# EAGLE board SmartMatrixSD_V3 (EAGLE 7.2.0)
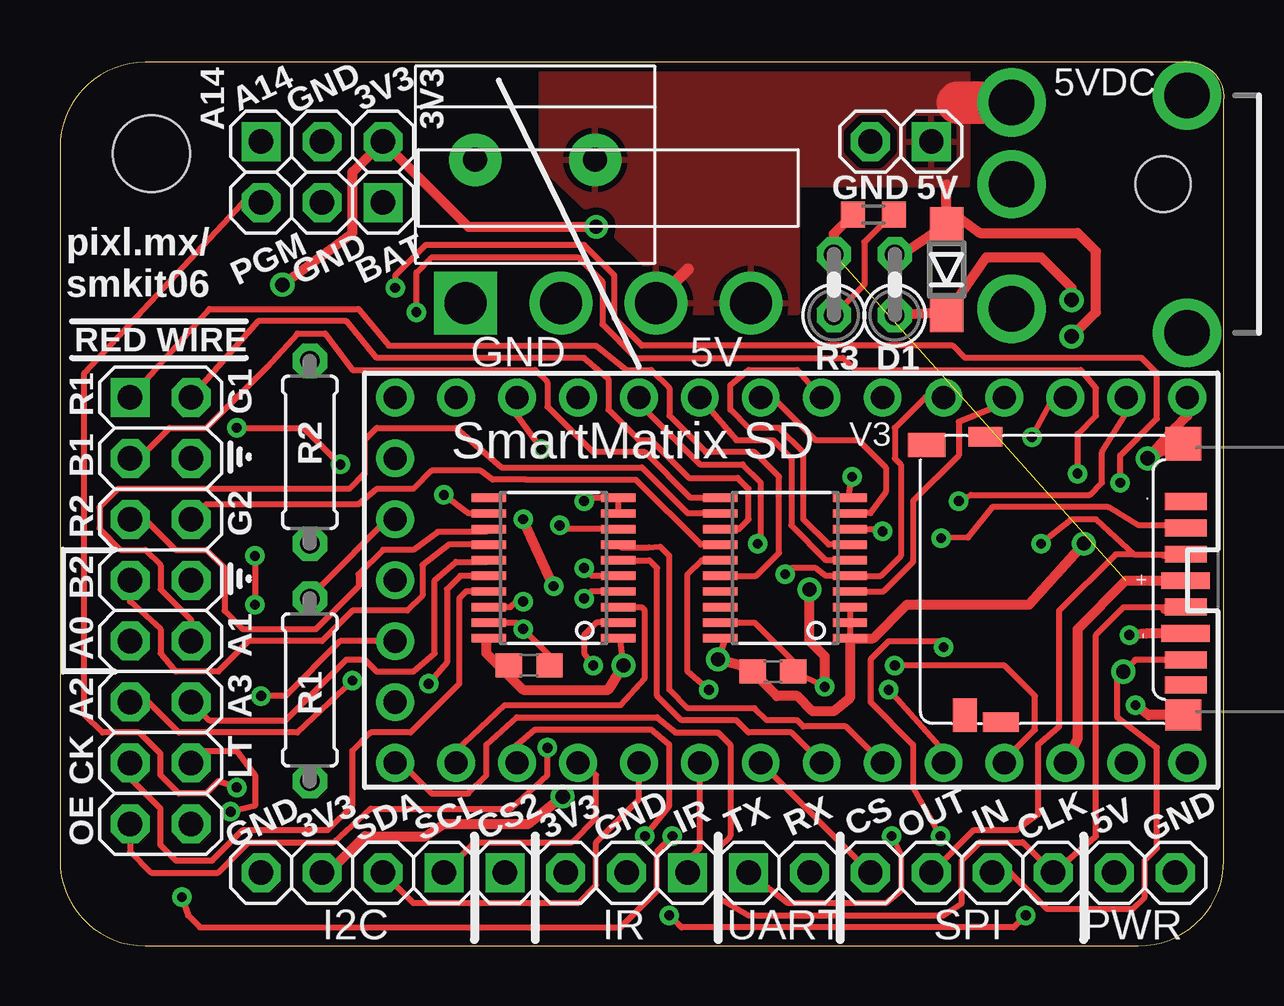
[diagram p0: board, top side]
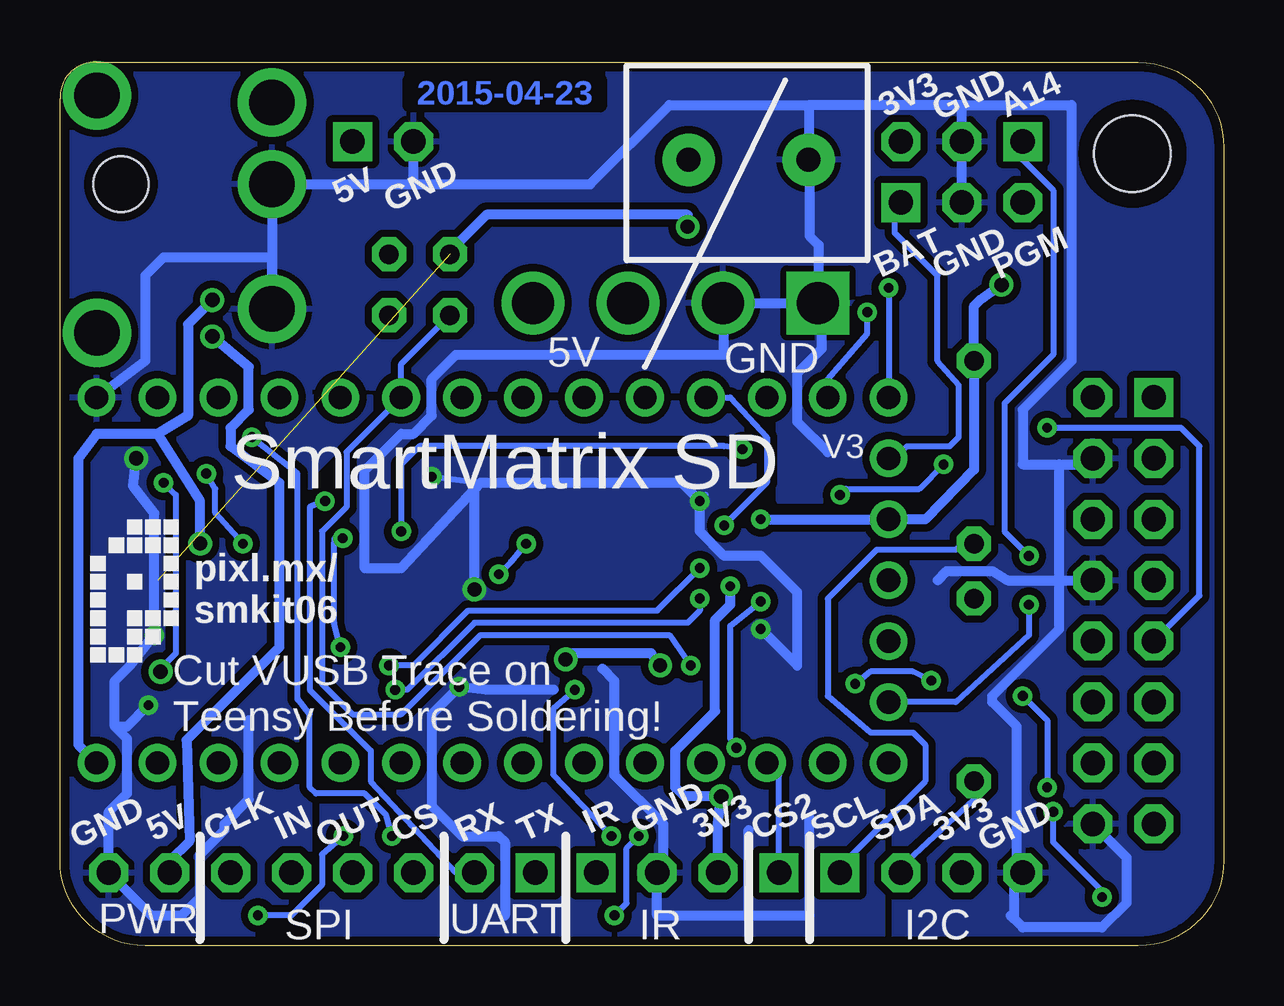
[diagram p1: board, bottom side, seen from below]

Size 48.51 x 36.83 mm. Coordinates in mm from the lower left corner, seen from the top.
Outline: 48.51,3.56 48.51,35.31 arc95 46.99,36.83 3.56,36.83 arc90 0,33.27 0,3.56 arc90 3.56,0 44.96,0 arc90 48.51,3.56
Copper layers (1*16): Top 0.0356mm / dielectric 1.5011mm / Bottom 0.0356mm
Design rules "OshParkMod-8mil-20150316": minimum track width 6mil, minimum drill 13mil, track to track 8mil, track to pad 8mil, pad to pad 8mil, via to via 8mil, smd to smd 8mil, copper to edge 15mil, drill to drill 6mil, minimum pad ring 12mil, minimum via ring 8mil, stop-mask expansion 3mil, vias tented up to drill 25mil, thermal gap 10mil
Net classes: 0 default: width 0.254 mm; 1 power: width 0.406 mm

## Footprints (pad centres in the part's own frame; a part is rotated, then mirrored left to right if it is on the bottom)
1X03-S = drill 1.016 square: 1 -2.54,0 | drill 1.016 octagon: 2 0,0; 3 2.54,0
C0603 = smd 1.1 x 1: 1 -0.85,0; 2 0.85,0
1X08-S = drill 1.016 square: 1 -8.89,0 | drill 1.016 octagon: 2 -6.35,0; 3 -3.81,0; 4 -1.27,0; 5 1.27,0; 6 3.81,0; 7 6.35,0; 8 8.89,0
1X01-S = drill 1.016 square: 1 0,0
SOD123 = smd 1.4 x 1.4: A 1.9,0; C -1.9,0
0207/2V = drill 0.813 octagon: 1 -1.27,0; 2 1.27,0
1X04-S = drill 1.016 square: 1 -3.81,0 | drill 1.016 octagon: 2 -1.27,0; 3 1.27,0; 4 3.81,0
TSSOP-20 = smd 0.35 x 1.43: 1 -2.925,-2.7; 2 -2.275,-2.7; 3 -1.625,-2.7; 4 -0.975,-2.7; 5 -0.325,-2.7; 6 0.325,-2.7; 7 0.975,-2.7; 8 1.625,-2.7; 9 2.275,-2.7; 10 2.925,-2.7; 11 2.925,2.7; 12 2.275,2.7; 13 1.625,2.7; 14 0.975,2.7; 15 0.325,2.7; 16 -0.325,2.7; 17 -0.975,2.7; 18 -1.625,2.7; 19 -2.275,2.7; 20 -2.925,2.7
1X2-5.0MM = drill 1 pad 2.184: 1 2.5,0; 2 -2.5,0
1X04-1.56" = drill 1.75 square: 1 -5.944,0 | drill 1.75: 2 -1.981,0; 3 1.981,0; 4 5.944,0
2X08 = drill 1.016 square: 1 -8.89,-1.27 | drill 1.016 octagon: 2 -8.89,1.27; 3 -6.35,-1.27; 4 -6.35,1.27; 5 -3.81,-1.27; 6 -3.81,1.27; 7 -1.27,-1.27; 8 -1.27,1.27; 9 1.27,-1.27; 10 1.27,1.27; 11 3.81,-1.27; 12 3.81,1.27; 13 6.35,-1.27; 14 6.35,1.27; 15 8.89,-1.27; 16 8.89,1.27
STAND-OFF-3MM = hole 3.2: 0,0
DM3D = smd 0.7 x 1.75: CD/DAT3 8.15,0.45; CLK 4.85,0.45; CMD 7.05,0.45; DAT0 2.65,0.45; DAT1 1.6,0.45; DAT2 9.25,0.45 | smd 0.8 x 1.5: GND1 0.05,8.15 | smd 0.8 x 1.4: GND2 11.95,8.8 | smd 1.4 x 1.5: GND3 11.65,0.55 | smd 1.3 x 1.5: GND4 0.35,0.55 | smd 1 x 1.55: SW_A 11.6,11.25 | smd 1.4 x 1: SW_B 0.35,9.65 | smd 0.7 x 2.032: VDD 5.95,0.45; VSS 3.75,0.45
1X02-S = drill 1.016 square: 1 -1.27,0 | drill 1.016 octagon: 2 1.27,0
R0603 = smd 1 x 1.1: 1 -0.85,0; 2 0.85,0
0207/7 = drill 0.813 octagon: 1 -3.81,0; 2 3.81,0
PJ-051AH-SINGLEDRILLS = drill 1.9: PIN 6.3,-3.4; RING 6.3,5.2; SHIELD1 -1,6.2; SHIELD2 -1,-3.7; SWITCH 6.3,0 | hole 2.3: 0,0
TEENSY_3.0_BASIC = drill 0.965: 0 -7.62,13.97; 1 -7.62,11.43; 2 -7.62,8.89; 3 -7.62,6.35; 3.3V 7.62,11.43; 3.3V1 -2.54,-16.51; 4 -7.62,3.81; 5 -7.62,1.27; 6 -7.62,-1.27; 7 -7.62,-3.81; 8 -7.62,-6.35; 9 -7.62,-8.89; 10 -7.62,-11.43; 11 -7.62,-13.97; 12 -7.62,-16.51; 13 7.62,-16.51; 14/A0 7.62,-13.97; 15/A1 7.62,-11.43; 16/A2 7.62,-8.89; 17/A3 7.62,-6.35; 18/A4 7.62,-3.81; 19/A5 7.62,-1.27; 20/A6 7.62,1.27; 21/A7 7.62,3.81; 22/A8 7.62,6.35; 23/A9 7.62,8.89; AGND 7.62,13.97; GND -7.62,16.51; GND1 0,-16.51; PGM 2.54,-16.51; RESET 5.08,-16.51; VBAT -5.08,-16.51; VIN 7.62,16.51

## Placement (x,y rotation side)
ADC/DAC  [1X03-S]  10.92,33.53 0 top
C1  0.1uF  [C0603]  19.56,11.68 0 top
C2  0.1uF  [C0603]  29.72,11.43 0 top
CC3000/SPI+UART  [1X08-S]  37.59,3.05 0 top
CS2  [1X01-S]  18.54,3.05 0 top
D3  MBR0520LT  [SOD123]  36.96,28.19 90 top
D3-THT  [0207/2V]  34.8,27.56 90 top
I2C/ADC  [1X04-S]  12.19,3.05 180 top
IC1  74245PW  [TSSOP-20]  20.57,15.75 90 top
IC2  74245PW  [TSSOP-20]  30.23,15.75 90 top
IR  [1X03-S]  23.62,3.05 180 top
J4  1X2-5.0  [1X2-5.0MM]  19.81,32.77 180 top
JP2  [1X04-1.56"]  22.86,26.8 0 top
JP4  [2X08]  4.19,13.97 270 top
JP5  STAND-OFFSTAND-OFF-3MM  [STAND-OFF-3MM]  3.81,33.02 0 top
MICROSD  MICROSD-HRS_DM3D  [DM3D]  47.37,9.27 90 top
MISC  [1X03-S]  10.92,30.99 180 top
PWR  [1X02-S]  35.05,33.53 180 top
R1  [R0603]  33.91,30.48 180 top
R1-THT  [0207/2V]  32.26,27.56 90 top
R2  [0207/7]  10.41,10.67 90 top
R3  [0207/7]  10.41,20.57 90 top
U$1  PJ-051AHSINGLEDRILLS  [PJ-051AH-SINGLEDRILLS]  45.97,31.75 180 top
U$3  TEENSY_3.0_BASIC_SEPGNDSSEPGNDS  [TEENSY_3.0_BASIC]  30.48,15.24 270 top
U$5  [PIXELMATIX-LOGO-235X135]  47.24,11.81 0 bottom

## Library data of the parts
ADC/DAC CC3000/SPI+UART CS2 I2C/ADC IR JP4 MISC PWR = pinhead-2
C1 C2 = scanlime; PARTNO: CAP CER 0.1UF 10V 10% X7R 0805
D3 = diode
D3-THT R1 R1-THT R2 R3 = rcl
IC1 IC2 J4 JP2 JP5 U$1 U$3 U$5 = eclibrary
MICROSD = hrs_DM3D-SF

## Nets
0/WIFI_RST/UART_RX: CC3000/SPI+UART.2 U$3.0
1/WIFI_INT_UART_TX: CC3000/SPI+UART.1 U$3.1
3V3 [power]: ADC/DAC.3 I2C/ADC.3 IR.3 MICROSD.VDD R1-THT.2 R1.2 R2.2 R3.2 U$3.3.3V U$3.3.3V1
11/SPI_MOSI: CC3000/SPI+UART.4 MICROSD.CMD U$3.11
12/SPI_MISO: CC3000/SPI+UART.5 MICROSD.DAT0 U$3.12
13/SPI_SCK: CC3000/SPI+UART.6 MICROSD.CLK U$3.13
15/SD_CS: CS2.1 MICROSD.CD/DAT3 U$3.15/A1
16/SCL: I2C/ADC.1 R3.1 U$3.16/A2
17/SDA: I2C/ADC.2 R2.1 U$3.17/A3
18/IR: IR.1 U$3.18/A4
19/WIFI_CS: CC3000/SPI+UART.3 U$3.19/A5
AGND: U$3.AGND
BUFFER_ADX0: IC1.8 U$3.9
BUFFER_ADX1: IC2.8 U$3.10
BUFFER_ADX2: IC1.4 U$3.22/A8
BUFFER_ADX3: IC1.5 U$3.23/A9
BUFFER_B1: IC2.9 U$3.6
BUFFER_B2: IC1.6 U$3.20/A6
BUFFER_CLK: IC1.3 U$3.14/A0
BUFFER_G1: IC2.7 U$3.5
BUFFER_G2: IC2.6 U$3.7
BUFFER_LATCH: IC2.5 U$3.3 U$3.8
BUFFER_OE: IC1.2 R1-THT.1 R1.1 U$3.4
BUFFER_R1: IC2.4 U$3.2
BUFFER_R2: IC1.7 U$3.21/A7
DAC/A14: ADC/DAC.1 U$3.RESET
GND [power]: ADC/DAC.2 C1.2 C2.2 CC3000/SPI+UART.8 I2C/ADC.4 IC1.9 IC1.10 IC1.19 IC2.10 IC2.19 IR.2 J4.1 JP2.1 JP2.2 JP4.4 JP4.8 JP4.16 MICROSD.GND3 MICROSD.GND4 MICROSD.VSS MISC.2 PWR.2 U$1.RING U$1.SWITCH U$3.GND
GND-REAR: U$3.GND1
PANEL_ADX0: IC1.12 JP4.9
PANEL_ADX1: IC2.12 JP4.10
PANEL_ADX2: IC1.16 JP4.11
PANEL_ADX3: IC1.15 JP4.12
PANEL_B1: IC2.11 JP4.3
PANEL_B2: IC1.14 JP4.7
PANEL_CLK: IC1.17 JP4.13
PANEL_G1: IC2.13 JP4.2
PANEL_G2: IC2.14 JP4.6
PANEL_LATCH: IC2.15 JP4.14
PANEL_OE: IC1.18 JP4.15
PANEL_R1: IC2.16 JP4.1
PANEL_R2: IC1.13 JP4.5
PGM: MISC.3 U$3.PGM
VBAT: MISC.1 U$3.VBAT
VEXT [power]: CC3000/SPI+UART.7 D3-THT.2 D3.A J4.2 JP2.3 JP2.4 PWR.1 U$1.PIN
VIN [power]: C1.1 C2.1 D3-THT.1 D3.C IC1.1 IC1.20 IC2.1 IC2.2 IC2.3 IC2.20 U$3.VIN

## Tracks (layer width: path | path; a pad name or v marks a point on that pad's centre or on a via)
0/WIFI_RST/UART_RX  (via drill 0.41)
  Top 0.254: v37.47,18.54 37.97,18.8 42.93,18.8 43.43,19.3 43.43,20.57 44.7,22.61 U$3.0
  Bottom 0.254: v37.47,18.54 38.1,18.29 38.1,10.67 35.56,8.13 35.56,6.86 32,3.05 CC3000/SPI+UART.2
1/WIFI_INT_UART_TX  (via drill 0.41)
  Top 0.254: v40.51,21.21 41.4,22.86 U$3.1 | v34.67,4.57 35.05,3.81 35.05,2.29 34.42,1.78 30.35,1.78 CC3000/SPI+UART.1
  Bottom 0.254: v40.51,21.21 40.39,21.08 38.61,19.68 38.61,10.29 38.1,9.65 38.1,6.6 37.85,6.35 35.81,6.35 34.92,5.46 v34.67,4.57
3V3  (via drill 0.41, 0.58 pad 0.58, 0.6, 0.6 pad 0.51)  (1 unrouted)
  Top 0.254: R2.2 10.92,15.05 13.56,17.68 U$3.3.3V1
  Top 0.406: U$3.3.3V 42.42,8.64 42.42,13.21 44.43,15.22 MICROSD.VDD | v20.57,14.99 v19.3,17.78 | v9.27,27.56 12.19,29.72 12.19,32.26 ADC/DAC.3 17.02,29.97 v22.35,29.97 | I2C/ADC.3 11.18,3.05 12.7,4.57 15.24,4.57 16,5.08 19.51,5.08 v20.95,6.22 | R1.2 32.26,29.68 R1-THT.2
  Bottom 0.406: IR.3 21.08,5.08 v20.95,6.22 22.48,6.22 22.86,6.6 22.86,8.13 21.21,9.78 21.21,13.59 20.57,14.22 v20.57,14.99 | v19.3,17.78 U$3.3.3V1 12.45,17.78 10.41,19.84 R3.2 10.41,26.67 10.16,26.92 v9.27,27.56 | v22.35,29.97 22.35,30.48 30.73,30.48 32.26,28.96 R1-THT.2
11/SPI_MOSI  (via drill 0.41)
  Top 0.254: 45.97,16.26 MICROSD.CMD 44.77,16.32 | 44.77,16.32 43.18,17.78 42.16,17.78 v40.89,16.76 | CC3000/SPI+UART.4 38.1,4.83 39.88,4.83 40.77,5.46 40.77,8.38 41.66,9.14 41.66,13.97 44.01,16.32 44.77,16.32 | v14.86,26.42 14.86,28.07 15.49,28.7 21.59,28.7 22.61,27.69 22.61,25.91 24,24.51 32.64,24.51 33.15,24 42.55,24 43.18,23.24 43.18,22.1 42.42,21.34 v42.42,19.68
  Bottom 0.254: v40.89,16.76 42.04,18.03 42.04,19.05 v42.42,19.68 | U$3.11 16.51,23.62 14.86,25.53 v14.86,26.42
12/SPI_MISO  (via drill 0.41, 0.6 pad 0.41)
  Top 0.254: 47.37,11.94 47.19,11.94 46.86,11.93 | 46.86,11.93 MICROSD.DAT0 | CC3000/SPI+UART.5 39.62,3.05 41.15,1.52 44.7,1.52 45.21,2.03 45.21,3.56 45.72,4.06 45.72,8.26 44.07,9.53 44.07,11.18 v44.32,11.43 44.81,11.92 46.86,11.92 | 46.88,11.92 46.86,11.92 | 46.86,11.92 46.86,11.93 | v44.2,19.3 44.2,20.45 45.72,21.97 45.72,23.88 45.09,24.51 37.72,24.51 37.21,25.02 24.26,25.02 23.11,26.16 23.11,27.94 21.84,29.21 15.24,29.21 13.97,27.94 v13.97,27.43
  Bottom 0.254: v44.2,19.3 43.69,18.8 43.69,12.19 44.39,11.49 v44.32,11.43 | v13.97,27.43 U$3.12
13/SPI_SCK
  Top 0.254: 46.01,13.97 MICROSD.CLK 44.35,14.12 43.18,12.95 43.18,4.57 CC3000/SPI+UART.6 40.13,4.32 38.35,4.32 37.59,3.56 37.59,1.78 36.83,1.27 28.7,1.27 27.43,2.03 27.43,4.06 27.94,4.57 27.94,8.38 27.43,8.89 25.65,8.89 24.89,9.53 19.05,9.53 17.78,8.38 17.78,7.11 17.02,6.35 15.49,6.35 14.1,7.75 13.97,7.75 U$3.13
15/SD_CS  (via drill 0.41)
  Top 0.254: MICROSD.CD/DAT3 46.05,17.53 44.96,17.53 43.69,18.29 38.86,18.29 37.85,17.02 36.86,16.99 v36.73,16.99 | v36.83,12.45 36.58,12.7 34.54,12.7 33.78,11.94 33.78,10.16 35.56,8.38 35.56,6.6 v36.7,4.57 | U$3.15/A1 19.05,8.38 19.81,9.02 24.64,9.02 25.4,8.38 25.4,5.84 v24.38,4.57 | v40.26,1.27 39.75,0.76 25.91,0.76 v25.4,1.27
  Bottom 0.254: CS2.1 18.54,7.11 U$3.15/A1 | v36.83,12.45 37.08,13.46 37.08,16.71 37.06,16.99 v36.73,16.99 | v36.7,4.57 37.59,3.81 37.59,2.54 38.86,1.27 v40.26,1.27 | v25.4,1.27 24.89,1.78 24.89,4.06 v24.38,4.57
16/SCL
  Top 0.254: I2C/ADC.1 17.27,4.32 21.34,4.32 22.35,5.33 22.35,7.11 21.84,7.62 U$3.16/A2
  Bottom 0.254: R3.1 10.67,17.02 11.18,16.51 14.48,16.51 16.51,14.48 16.51,10.41 14.73,8.89 12.95,8.89 12.45,8.38 12.45,6.86 16,3.3 I2C/ADC.1
17/SDA
  Top 0.254: I2C/ADC.2 14.73,1.78 21.59,1.78 22.35,2.54 22.35,4.32 24.13,6.1 U$3.17/A3
  Bottom 0.254: R2.1 10.41,6.1 13.46,3.3 I2C/ADC.2
18/IR
  Top 0.254: IR.1 26.16,3.56 26.67,4.06 U$3.18/A4
19/WIFI_CS
  Top 0.254: U$3.19/A5 CC3000/SPI+UART.3
BUFFER_ADX0  (via drill 0.41)
  Top 0.254: IC1.8 20.98,17.37 v20.83,17.53
  Bottom 0.254: U$3.9 20.57,22.86 19.05,21.21 19.05,19.3 v20.83,17.53
BUFFER_ADX1  (via drill 0.41)
  Top 0.254: U$3.10 19.05,22.1 v20.07,20.7 | IC2.8 34.14,17.37 v34.29,17.27
  Bottom 0.254: v34.29,17.27 34.29,20.07 33.53,20.83 20.83,20.83 v20.07,20.7
BUFFER_ADX2  (via drill 0.41)
  Top 0.254: U$3.22/A8 36.83,8.13 v34.54,10.67 | IC1.4 22.14,14.77 v21.84,14.48
  Bottom 0.254: v21.84,14.48 21.84,13.97 22.35,13.46 31.24,13.46 34.04,10.67 v34.54,10.67
BUFFER_ADX3  (via drill 0.41)
  Top 0.254: U$3.23/A9 39.37,7.75 40.64,9.02 40.64,10.41 39.37,11.68 v34.8,11.68 | IC1.5 22.17,15.42 v21.84,15.75
  Bottom 0.254: v34.8,11.68 33.78,11.68 31.5,13.97 23.62,13.97 v21.84,15.75
BUFFER_B1
  Top 0.254: U$3.6 29.72,22.86 31.5,21.08 33.27,21.08 34.42,19.94 34.42,18.92 33.78,18.03 32.94,18.03 IC2.9
BUFFER_B2
  Top 0.254: IC1.6 24.57,16.07 24.89,15.75 24.89,10.41 25.91,9.4 28.19,9.4 28.7,8.89 30.48,8.89 U$3.20/A6
BUFFER_CLK
  Top 0.254: IC1.3 24.23,14.12 24.38,13.97 24.38,11.18 23.37,10.03 18.54,10.03 16.51,8.13 U$3.14/A0
BUFFER_G1
  Top 0.254: U$3.5 30.73,24 28.7,24 27.94,23.37 27.94,22.35 28.7,21.59 29.97,21.59 30.99,20.57 30.99,17.78 32.05,16.72 IC2.7
BUFFER_G2
  Top 0.254: U$3.7 28.19,21.08 29.72,21.08 30.48,20.32 30.48,17.53 31.93,16.07 IC2.6
BUFFER_LATCH  (via drill 0.41)
  Top 0.254: U$3.3 36.07,22.86 34.8,21.59 34.8,20.32 35.05,20.07 35.05,16.26 34.22,15.42 IC2.5 31.93,15.42 31.5,15.75 30.48,15.75 v30.23,15.49 | v29.08,16.76 29.08,16.89 29.21,17.02 29.21,19.3 28.45,20.07 26.67,20.07 24.13,22.61 U$3.8
  Bottom 0.254: v29.08,16.76 29.72,16 v30.23,15.49
BUFFER_OE  (via drill 0.41)
  Top 0.254: IC1.2 22.36,13.47 21.84,12.95 21.84,12.19 v22.23,11.68 | R1.1 34.67,30.48 33.53,29.34 33.53,27.56 R1-THT.1
  Bottom 0.254: v22.23,11.68 23.11,12.95 30.99,12.95 34.29,9.65 36.32,9.65 37.59,10.92 37.59,17.27 36.58,18.29 36.58,20.57 U$3.4 34.29,24.26 R1-THT.1
BUFFER_R1
  Top 0.254: U$3.2 39.37,22.61 37.47,21.84 37.47,20.45 35.56,18.54 35.56,16 34.33,14.77 IC2.4
BUFFER_R2
  Top 0.254: U$3.21/A7 32.77,9.14 30.99,9.14 30.73,9.4 29.46,9.4 28.96,9.91 26.16,9.91 25.4,10.67 25.4,16.26 25.02,16.64 24.54,16.61 23.39,16.61 IC1.7
DAC/A14  (via drill 0.41)
  Top 0.254: v8.13,16.26 v8.13,14.22
  Bottom 0.254: ADC/DAC.1 8.38,32.77 7.11,31.5 7.11,24.64 9.14,22.61 9.14,17.27 v8.13,16.26 | v8.13,14.22 8.13,12.95 11.18,10.16 U$3.RESET
GND  (via drill 0.41, 0.58 pad 0.58, 0.6)
  Top 0.254: IC1.19 19.04,13.47 v19.3,13.21 20.41,12.1 C1.2 | v21.84,18.54 21.98,18.67 IC1.10 IC1.9 | IC2.10 32.9,18.93 v33.02,19.56 | IC2.19 28.95,13.47 30.57,11.85 C2.2 v31.88,10.79
  Top 0.406: MICROSD.GND3 45.84,20.57 v45.34,20.32 46.48,21.59 46.99,22.1 U$3.GND | MICROSD.VSS 45.27,13.02 v44.58,12.95 | MICROSD.GND4 45.37,9.62 v44.83,10.03 | v31.88,10.79 31.88,12.06 31.24,12.7 v31.24,14.86
  Bottom 0.254: v21.84,18.54 21.59,18.8 | v33.02,19.56 30.99,19.3
  Bottom 0.406: MISC.2 ADC/DAC.2 | ADC/DAC.2 11.18,33.78 | 11.94,15.24 11.56,15.62 9.65,15.62 9.02,15.24 6.86,15.24 | 6.86,15.24 JP4.8 | U$3.GND 44.96,24.38 44.96,27.94 44.2,28.7 39.67,28.7 U$1.RING U$1.SWITCH 33.78,31.75 | 46.23,9.14 45.72,8.64 45.72,6.35 46.48,5.59 CC3000/SPI+UART.8 44.7,1.27 43.43,1.27 42.67,2.03 42.67,3.81 41.66,4.83 41.66,5.08 40.64,6.1 40.64,9.4 | 46.23,9.14 46.23,11.05 45.59,11.68 v44.58,12.95 44.58,18.03 45.47,19.18 v45.34,20.32 | 31.24,19.05 34.29,15.75 35.81,15.75 35.81,19.81 34.29,21.34 33.78,21.34 33.02,22.1 33.02,23.62 32,24.64 20.83,24.64 20.83,26.8 | 33.78,31.75 26.42,31.75 23.11,35.05 17.27,35.05 | ADC/DAC.2 10.92,35.05 | 10.92,35.05 17.27,35.05 | 10.92,35.05 6.35,35.05 6.35,24.38 8.38,22.35 8.38,20.07 6.86,20.07 | 6.86,20.07 5.71,20.07 JP4.4 | 6.86,15.24 6.86,20.07 | 25.91,11.56 25.4,11.05 25.4,7.11 23.37,5.08 23.37,3.3 IR.2 23.62,1.27 19.81,1.27 | 27.94,10.67 30.73,10.67 v31.88,10.79 33.02,9.65 33.02,5.84 31.75,4.57 30.23,4.57 29.97,4.32 29.97,1.27 | v19.3,13.21 17.78,11.68 17.78,14.73 19.3,16.26 20.83,16.26 21.84,17.27 v21.84,18.54 22.61,19.3 30.99,19.3 31.24,19.05 | 6.86,15.24 6.86,13.21 9.65,10.41 9.65,10.16 8.64,9.14 8.64,3.3 I2C/ADC.4 8.76,2.67 8.76,1.14 | v31.24,14.86 31.24,19.05 | 33.78,31.75 PWR.2 | 46.23,9.14 45.72,9.14 v44.83,10.03 | JP2.2 20.83,26.8 | 20.83,26.8 16.89,26.8 | J4.1 17.27,32.81 17.27,35.05 | JP4.16 4.06,3.68 4.06,1.78 5.08,0.76 8.38,0.76 8.76,1.14 | 8.76,1.14 8.89,1.27 | 19.81,1.27 17.27,1.27 17.27,5.33 | 19.81,1.27 19.81,4.83 | 16.51,20.57 17.78,21.84 17.78,23.88 16.76,24.89 16.76,26.8 16.89,26.92 | 17.27,32.77 17.27,29.59 16.89,29.21 16.89,26.92
  Bottom 0.406: 16.89,26.92 16.89,26.8 | 16.89,26.8 16.76,26.92
  pour Bottom (isolate 0.305): 48.51,36.58 48.51,0.25 38.1,0.25 38.1,19.56 35.56,22.1 35.56,22.86 38.1,22.86 38.1,36.58
  pour Bottom (isolate 0.305): 48.51,36.83 0.25,36.83 0.25,0.25 13.72,0.25 13.72,7.87 16.51,10.67 16.51,14.22 13.72,17.02 13.72,18.54 18.54,18.54 18.54,23.11 20.57,23.11 48.51,23.37
  pour Bottom (isolate 0.305): 37.59,0.25 14.22,0.25 14.22,8.13 16.51,10.41 16.76,10.41 16.76,14.48 14.22,17.02 14.22,18.29 18.8,18.29 18.8,22.61 34.54,22.61 37.59,19.56
PANEL_ADX0  (via drill 0.41)
  Top 0.254: IC1.12 17.03,18.02 v16,18.8 | v7.37,21.59 10.16,21.59 v11.68,20.07
  Bottom 0.254: JP4.9 1.02,14.61 1.02,20.83 1.78,21.59 v7.37,21.59 | v16,18.8 15.75,19.05 12.7,19.05 v11.68,20.07
PANEL_ADX1
  Top 0.254: JP4.10 5.46,13.59 4.19,14.86 4.19,15.88 3.56,16.51 2.54,16.51 1.65,17.4 1.65,18.29 2.41,19.05 12.06,19.05 12.7,19.68 12.7,21.08 13.21,21.59 16.51,21.59 18.41,19.94 24.26,19.94 26.17,18.02 IC2.12
PANEL_ADX2  (via drill 0.41)
  Top 0.254: JP4.11 3.68,10.16 4.95,8.89 9.91,8.89 v12.19,11.05 | v15.37,10.92 16.13,11.81 16.13,14.86 16.69,15.42 IC1.16
  Bottom 0.254: v12.19,11.05 12.95,11.43 14.73,11.43 v15.37,10.92
PANEL_ADX3
  Top 0.254: JP4.12 6.22,9.4 9.4,9.4 11.94,11.94 12.7,11.94 13.21,11.43 14.73,11.43 15.62,12.19 15.62,15.24 16.51,16 17.8,16 IC1.15
PANEL_B1
  Top 0.254: JP4.3 3.3,20.32 4.57,21.59 6.1,21.59 8.64,24.13 9.91,25.53 11.05,25.53 12.19,24 19.81,24 20.32,23.5 20.32,22.48 22.23,20.57 24.38,20.57 26.29,18.67 IC2.11
PANEL_B2
  Top 0.254: JP4.7 2.92,14.35 4.19,13.21 4.19,12.19 4.83,11.43 6.6,11.43 7.87,12.7 10.92,12.7 12.19,13.97 14.48,13.97 15.11,14.61 15.11,15.88 16.21,16.72 IC1.14
PANEL_CLK
  Top 0.254: 3.05,7.62 JP4.13 2.92,6.99 4.19,5.71 4.19,4.19 4.83,3.56 6.35,3.56 7.62,4.83 11.18,4.83 12.19,5.84 12.19,8.13 12.95,8.89 14.61,8.89 16.64,10.92 16.64,14.48 16.93,14.77 IC1.17
PANEL_G1
  Top 0.254: JP4.2 5.59,22.73 5.33,22.73 8.26,26.04 11.94,26.04 13.21,24.51 21.84,24.51 22.86,23.62 22.86,22.35 24.13,21.08 24.64,21.08 26.21,19.51 28.25,19.51 28.7,19.05 28.7,17.78 28.3,17.37 IC2.13
PANEL_G2
  Top 0.254: JP4.6 6.1,18.41 12.45,18.41 13.21,19.05 14.73,19.05 15.49,19.81 17.53,19.81 18.03,19.43 19.43,19.43 24,19.43 26.71,16.72 IC2.14
PANEL_LATCH  (via drill 0.41)
  Top 0.254: JP4.14 5.97,8.13 7.37,8.13 8.13,7.11 8.13,5.84 v7.11,5.59 | v5.08,2.03 5.33,1.27 5.84,0.76 23.37,0.76 24.89,2.29 24.89,3.94 v25.53,4.57 | v27.05,10.67 26.16,11.43 26.16,15.49 26.74,16.07 IC2.15
  Bottom 0.254: v5.08,2.03 5.08,2.29 7.11,4.32 v7.11,5.59 | v25.53,4.57 27.94,7.11 27.94,9.91 v27.05,10.67
PANEL_OE  (via drill 0.41)
  Top 0.254: JP4.15 2.92,3.94 3.81,3.05 6.6,3.05 7.87,4.32 11.43,4.32 12.95,5.71 18.8,5.71 20.32,7.11 v20.32,8.26 | IC1.18 18.77,14.12 19.05,14.35 v19.3,14.35
  Bottom 0.254: v20.32,8.26 20.57,8.64 20.57,13.34 v19.3,14.35
PANEL_R1
  Top 0.254: JP4.1 6.22,26.54 12.45,26.54 13.72,25.02 22.35,25.02 23.62,24 24.64,24 25.4,23.24 25.4,22.1 26.92,20.57 28.96,20.57 29.97,19.56 29.97,16.38 29.01,15.42 IC2.16
PANEL_R2
  Top 0.254: JP4.5 3.56,17.78 4.83,16.51 6.1,16.51 6.86,15.75 6.86,13.97 7.62,13.21 10.67,13.21 12.45,14.99 12.45,15.49 13.46,16.51 14.73,16.51 15.76,17.26 17.76,17.26 IC1.13
PGM  (via drill 0.41)
  Top 0.254: U$3.PGM 11.68,12.7 9.4,10.41 v8.38,10.41 | MISC.3 7.62,30.99 1.02,23.88 1.02,9.65 1.78,8.89 3.3,8.89 4.19,8 4.19,7.11 4.95,6.35 6.1,6.35 6.6,6.86 v7.37,6.6
  Bottom 0.254: v8.38,10.41 7.37,9.4 v7.37,6.6
VBAT
  Bottom 0.254: U$3.VBAT 13.72,20.32 13.21,20.83 11.43,20.83 11.05,21.21 11.05,23.37 11.94,24.38 11.94,27.94 13.72,29.72 13.72,30.73 MISC.1
VEXT  (via drill 0.6)
  Top 0.406: v42.16,25.4 43.18,26.42 43.18,28.96 42.42,29.72 38.35,29.72 37.47,30.35 D3.A | D3.A 36.96,31.75 | D3-THT.2 35.31,28.96 D3.A
  Top 0.508: 24.89,26.92 26.16,28.19
  Top 1.778: U$1.PIN 37.44,35.15
  Bottom 0.406: v42.16,25.4 40.64,24.13 40.64,22.35 41.4,21.59 41.4,20.83 39.37,19.3 39.37,12.45 43.24,8.57 43.11,4.36 43.94,3.54 CC3000/SPI+UART.7
  pour Top (isolate 0.305): 37.85,36.58 20.07,36.58 20.07,32.51 24.38,28.45 24.38,26.42 30.73,26.42 30.73,31.75 37.85,31.75
VIN  (via drill 0.58, 0.6)
  Top 0.254: 17.78,12.73 IC1.20 | v23.5,11.68 23.37,12.73 IC1.1 | IC2.3 IC2.2 IC2.1 | IC2.20 27.69,12.66 v27.43,11.94
  Top 0.406: v42.16,26.92 42.16,27.43 40.89,28.7 38.61,28.7 D3.C 36.57,26.42 D3-THT.1 | 17.78,12.73 17.78,12.19 18.41,11.56 C1.1 18.71,11.26 19.3,10.67 22.86,10.67 v23.5,11.68 | v42.67,16.76 40.39,14.22 35.31,14.22 33.91,12.82 IC2.1 32.93,10.32 32.26,9.78 31.37,9.78 30.73,10.41 29.88,10.41 C2.1 28.36,11.68 v27.43,11.94
  Bottom 0.406: v42.16,26.92 43.18,25.91 43.18,22.1 44.45,21.34 | 44.45,21.34 46.99,21.34 47.75,20.32 47.75,8.38 U$3.VIN | v23.5,11.68 23.88,12.19 27.43,12.19 v27.43,11.94 | v42.67,16.76 42.67,18.54 44.45,21.34

## Text on the board
Bottom: 2015-04-23
tPlace: A14 | A14 | GND | 3V3 | 3V3 | 5VDC | GND | 5V | PGM | GND | BAT | pixl.mx/ / smkit06 | RED WIRE | GND | 5V | R3 | D1 | R1 | G1 | R2 | V3 | B1 | SmartMatrix SD | R2 | G2 | B2 | A0 | A1 | R1 | A2 | A3 | CK | LT | OE | GND | 3V3 | SDA | SCL | CS2 | 3V3 | GND | IR | TX | RX | CS | OUT | IN | CLK | 5V | GND | I2C | IR | UART | SPI | PWR
bPlace: A14 | GND | 3V3 | GND | 5V | PGM | GND | BAT | GND | 5V | V3 | SmartMatrix SD | pixl.mx/ / smkit06 | Cut VUSB Trace on / Teensy Before Soldering! | GND | 3V3 | SDA | SCL | CS2 | 3V3 | GND | IR | TX | RX | CS | OUT | IN | CLK | 5V | GND | UART | PWR | I2C | IR | SPI
Document: SmartMatrix SD Shield | Rev V3 | Pixelmatix 2015 CC BY-SA | Note: The 3V3 airwire is intentional, / the two points are connected together / on Teensy board